# EAGLE board pic (EAGLE 5.06)
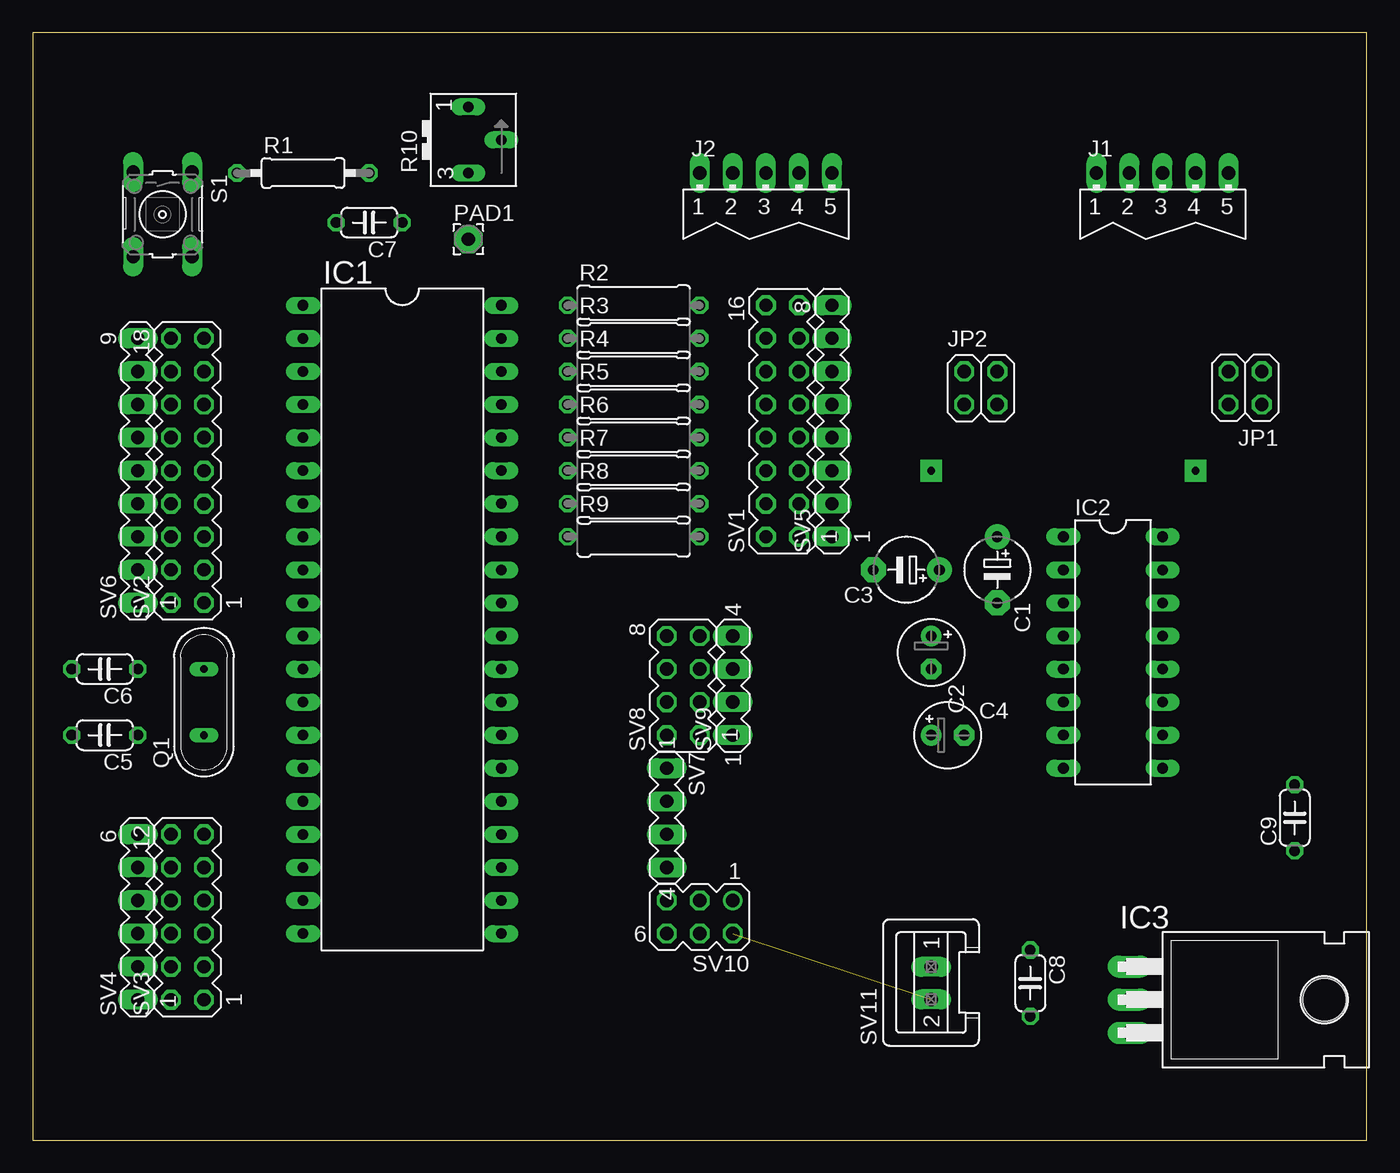
[diagram p0: board, top side]
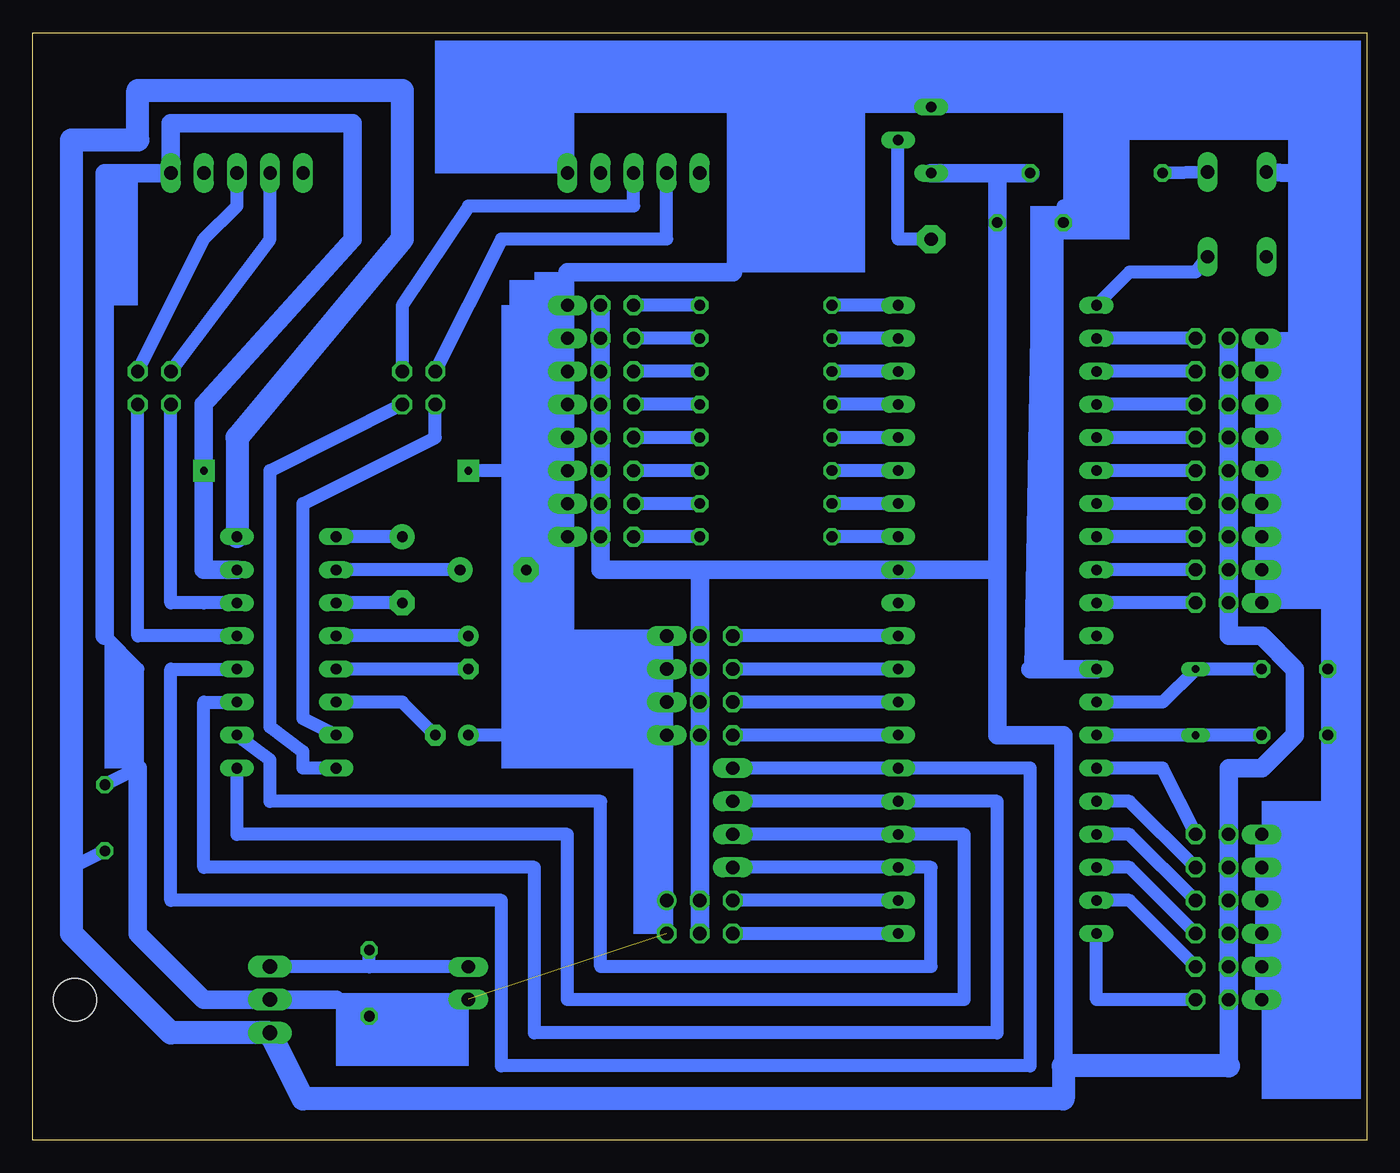
[diagram p1: board, bottom side, seen from below]

Size 102.54 x 85.08 mm. Coordinates in mm from the lower left corner, seen from the top.
Outline: 0,0 102.54,0 102.54,85.08 0,85.08 0,0
Copper layers (1*16): Top 0.035mm / dielectric 1.5mm / Bottom 0.035mm
Design rules "default": minimum track width 10mil, minimum drill 24mil, track to track 8mil, track to pad 8mil, pad to pad 8mil, via to via 8mil, smd to smd 8mil, copper to edge 40mil, drill to drill 8mil, minimum pad ring 10mil, minimum via ring 8mil, stop-mask expansion 4mil, vias tented up to drill 0mil, thermal gap 10mil

## Footprints (pad centres in the part's own frame; a part is rotated, then mirrored left to right if it is on the bottom)
E5-5 = drill 0.813 pad 1.905 round: + -2.54,0 | drill 0.813 pad 1.905 octagon: - 2.54,0
E2,5-5 = drill 0.813 pad 1.6 round: + -1.27,0 | drill 0.813 pad 1.6 octagon: - 1.27,0
C050-024X044 = drill 0.813 octagon: 1 -2.54,0; 2 2.54,0
DIL40 = drill 0.813 long: 1 -24.13,-7.62; 2 -21.59,-7.62; 3 -19.05,-7.62; 4 -16.51,-7.62; 5 -13.97,-7.62; 6 -11.43,-7.62; 7 -8.89,-7.62; 8 -6.35,-7.62; 9 -3.81,-7.62; 10 -1.27,-7.62; 11 1.27,-7.62; 12 3.81,-7.62; 13 6.35,-7.62; 14 8.89,-7.62; 15 11.43,-7.62; 16 13.97,-7.62; 17 16.51,-7.62; 18 19.05,-7.62; 19 21.59,-7.62; 20 24.13,-7.62; 21 24.13,7.62; 22 21.59,7.62; 23 19.05,7.62; 24 16.51,7.62; 25 13.97,7.62; 26 11.43,7.62; 27 8.89,7.62; 28 6.35,7.62; 29 3.81,7.62; 30 1.27,7.62; 31 -1.27,7.62; 32 -3.81,7.62; 33 -6.35,7.62; 34 -8.89,7.62; 35 -11.43,7.62; 36 -13.97,7.62; 37 -16.51,7.62; 38 -19.05,7.62; 39 -21.59,7.62; 40 -24.13,7.62
DIL16 = drill 0.813 long: 1 -8.89,-3.81; 2 -6.35,-3.81; 3 -3.81,-3.81; 4 -1.27,-3.81; 5 1.27,-3.81; 6 3.81,-3.81; 7 6.35,-3.81; 8 8.89,-3.81; 9 8.89,3.81; 10 6.35,3.81; 11 3.81,3.81; 12 1.27,3.81; 13 -1.27,3.81; 14 -3.81,3.81; 15 -6.35,3.81; 16 -8.89,3.81
TO220H = drill 1.118 long: 1 -2.54,-10.16; 2 0,-10.16; 3 2.54,-10.16 | hole 3.302: 0,4.826
JU05 = drill 1.016 long: 1 -5.08,0; 2 -2.54,0; 3 0,0; 4 2.54,0; 5 5.08,0
2X02 = drill 1.016 octagon: 1 -1.27,-1.27; 2 -1.27,1.27; 3 1.27,-1.27; 4 1.27,1.27
2,15/1,0 = drill 1.016 pad 2.159 octagon: 1 0,0
QS = drill 0.61 long: 1 -2.54,0; 2 2.54,0
0207/10 = drill 0.813 octagon: 1 -5.08,0; 2 5.08,0
0309/10 = drill 0.813 octagon: 1 -5.08,0; 2 5.08,0
RJ6S = drill 0.813 long: A 2.54,0; E -2.54,0; S 0,-2.54
B3F-10XX = drill 1.016 long: 1 -3.251,2.261; 2 3.251,2.261; 3 -3.251,-2.261; 4 3.251,-2.261
MA08-2 = drill 1.016 octagon: 1 -8.89,-1.27; 2 -8.89,1.27; 3 -6.35,-1.27; 4 -6.35,1.27; 5 -3.81,-1.27; 6 -3.81,1.27; 7 -1.27,-1.27; 8 -1.27,1.27; 9 1.27,-1.27; 10 1.27,1.27; 11 3.81,-1.27; 12 3.81,1.27; 13 6.35,-1.27; 14 6.35,1.27; 15 8.89,-1.27; 16 8.89,1.27
MA09-2 = drill 1.016 octagon: 1 -10.16,-1.27; 2 -10.16,1.27; 3 -7.62,-1.27; 4 -7.62,1.27; 5 -5.08,-1.27; 6 -5.08,1.27; 7 -2.54,-1.27; 8 -2.54,1.27; 9 0,-1.27; 10 0,1.27; 11 2.54,-1.27; 12 2.54,1.27; 13 5.08,-1.27; 14 5.08,1.27; 15 7.62,-1.27; 16 7.62,1.27; 17 10.16,-1.27; 18 10.16,1.27
MA06-2 = drill 1.016 octagon: 1 -6.35,-1.27; 2 -6.35,1.27; 3 -3.81,-1.27; 4 -3.81,1.27; 5 -1.27,-1.27; 6 -1.27,1.27; 7 1.27,-1.27; 8 1.27,1.27; 9 3.81,-1.27; 10 3.81,1.27; 11 6.35,-1.27; 12 6.35,1.27
MA06-1 = drill 1.016 long: 1 -6.35,0; 2 -3.81,0; 3 -1.27,0; 4 1.27,0; 5 3.81,0; 6 6.35,0
MA08-1 = drill 1.016 long: 1 -8.89,0; 2 -6.35,0; 3 -3.81,0; 4 -1.27,0; 5 1.27,0; 6 3.81,0; 7 6.35,0; 8 8.89,0
MA09-1 = drill 1.016 long: 1 -10.16,0; 2 -7.62,0; 3 -5.08,0; 4 -2.54,0; 5 0,0; 6 2.54,0; 7 5.08,0; 8 7.62,0; 9 10.16,0
MA04-1 = drill 1.016 long: 1 -3.81,0; 2 -1.27,0; 3 1.27,0; 4 3.81,0
MA04-2 = drill 1.016 octagon: 1 -3.81,-1.27; 2 -3.81,1.27; 3 -1.27,-1.27; 4 -1.27,1.27; 5 1.27,-1.27; 6 1.27,1.27; 7 3.81,-1.27; 8 3.81,1.27
MA03-2 = drill 1.016 round: 1 -2.54,-1.27 | drill 1.016 octagon: 2 -2.54,1.27; 3 0,-1.27; 4 0,1.27; 5 2.54,-1.27; 6 2.54,1.27
S02P = drill 1.016 long: 1 1.25,0; 2 -1.25,0

## Placement (x,y rotation side)
C1  1uF  [E5-5]  74.13,43.81 270 top
C2  1uF  [E2,5-5]  69.05,37.46 270 top
C3  1uF  [E5-5]  67.14,43.81 180 top
C4  1uF  [E2,5-5]  70.32,31.11 0 top
C5  22pF  [C050-024X044]  5.55,31.11 180 top
C6  22pF  [C050-024X044]  5.55,36.19 180 top
C7  0.01uF  [C050-024X044]  25.87,70.48 180 top
C8  0.33uF  [C050-024X044]  76.67,12.06 270 top
C9  15uF  [C050-024X044]  96.99,24.76 90 top
IC1  PIC16F877P  [DIL40]  28.41,40 270 top
IC2  MAX232  [DIL16]  83.02,37.46 270 top
IC3  7805T  [TO220H]  94.45,10.79 270 top
J1  [JU05]  86.83,74.29 0 top
J2  [JU05]  56.35,74.29 0 top
JP1  [2X02]  93.18,57.78 180 top
JP2  [2X02]  72.86,57.78 0 top
PAD1  [2,15/1,0]  33.49,69.21 0 top
Q1  [QS]  13.17,33.65 90 top
R1  [0207/10]  20.79,74.29 0 top
R2  [0309/10]  46.19,64.13 0 top
R3  [0309/10]  46.19,61.59 0 top
R4  [0309/10]  46.19,59.05 0 top
R5  [0309/10]  46.19,56.51 0 top
R6  [0309/10]  46.19,53.97 0 top
R7  [0309/10]  46.19,51.43 0 top
R8  [0309/10]  46.19,48.89 0 top
R9  [0309/10]  46.19,46.35 0 top
R10  [RJ6S]  33.49,76.83 90 top
S1  [B3F-10XX]  10,71.11 270 top
SV1  [MA08-2]  57.62,55.24 90 top
SV2  [MA09-2]  11.9,51.43 90 top
SV3  [MA06-2]  11.9,17.14 90 top
SV4  [MA06-1]  8.09,17.14 90 top
SV5  [MA08-1]  61.43,55.24 90 top
SV6  [MA09-1]  8.09,51.43 90 top
SV7  [MA04-1]  48.73,24.76 270 top
SV8  [MA04-2]  50,34.92 90 top
SV9  [MA04-1]  53.81,34.92 90 top
SV10  [MA03-2]  51.27,17.14 180 top
SV11  [S02P]  69.05,12.06 90 top

## Library data of the parts
C1-C9 R1-R9 = rcl
IC1 = microchip
IC2 = maxim
IC3 = linear
J1 J2 = con-lsta
JP1 JP2 = pinhead
PAD1 = wirepad
Q1 = special
R10 = pot
S1 = switch-omron
SV1-SV10 = con-lstb
SV11 = con-amp-mt

## Nets
GND: C3.- C4.+ C5.2 C6.2 C7.2 C8.2 C9.2 IC1.12 IC2.15 IC3.2 J1.5 J2.5 R10.A S1.3 SV4.1 SV4.2 SV4.3 SV4.4 SV4.5 SV4.6 SV5.1 SV5.2 SV5.3 SV5.4 SV5.5 SV5.6 SV5.7 SV5.8 SV6.1 SV6.2 SV6.3 SV6.4 SV6.5 SV6.6 SV6.7 SV6.8 SV6.9 SV9.1 SV9.2 SV9.3 SV9.4 SV10.1 SV10.2 SV11.2
N$1: C1.+ IC2.1
N$2: C1.- IC2.3
N$3: C2.+ IC2.4
N$4: C2.- IC2.5
N$5: R2.2 SV1.16
N$6: C4.- IC2.6
N$7: C3.+ IC2.2
N$8: IC1.40 R2.1
N$9: C6.1 IC1.13 Q1.2
N$10: IC1.25 IC2.11 SV7.2
N$11: IC1.26 IC2.12 SV7.1
N$12: IC2.13 JP1.2
N$13: IC2.14 JP1.4
N$14: C5.1 IC1.14 Q1.1
N$15: R1.1 S1.1
N$16: IC1.1 S1.2
N$17: IC1.39 R3.1
N$18: IC1.38 R4.1
N$19: IC1.37 R5.1
N$20: IC1.36 R6.1
N$21: IC1.35 R7.1
N$22: IC1.34 R8.1
N$23: IC1.33 R9.1
N$24: R3.2 SV1.14
N$25: R4.2 SV1.12
N$26: R5.2 SV1.10
N$27: R6.2 SV1.8
N$28: R7.2 SV1.6
N$29: R8.2 SV1.4
N$30: R9.2 SV1.2
N$32: IC1.2 SV2.17
N$33: IC1.3 SV2.15
N$34: IC1.4 SV2.13
N$35: IC1.5 SV2.11
N$36: IC1.6 SV2.9
N$37: IC1.7 SV2.7
N$38: IC1.8 SV2.5
N$39: IC1.9 SV2.3
N$40: IC1.10 SV2.1
N$41: IC1.15 SV3.11
N$42: IC1.16 SV3.9
N$43: IC1.17 SV3.7
N$44: IC1.18 SV3.5
N$45: IC1.19 SV3.3
N$46: IC1.20 SV3.1
N$47: C8.1 IC3.1 SV11.1
N$48: PAD1.1 R10.S
N$52: IC1.24 IC2.9 SV7.3
N$53: IC1.23 IC2.10 SV7.4
N$54: IC1.30 SV8.8
N$55: IC1.29 SV8.6
N$56: IC1.28 SV8.4
N$57: IC1.27 SV8.2
N$60: IC1.22 SV10.5
N$61: IC1.21 SV10.6
N$64: IC2.7 JP2.1
N$65: IC2.8 JP2.3
N$66: J1.3 JP1.1
N$67: J1.2 JP1.3
N$68: J2.2 JP2.2
N$69: J2.3 JP2.4
VCC: C7.1 C9.1 IC1.32 IC2.16 IC3.3 R1.2 R10.E SV1.1 SV1.3 SV1.5 SV1.7 SV1.9 SV1.11 SV1.13 SV1.15 SV2.2 SV2.4 SV2.6 SV2.8 SV2.10 SV2.12 SV2.14 SV2.16 SV2.18 SV3.2 SV3.4 SV3.6 SV3.8 SV3.10 SV3.12 SV8.1 SV8.3 SV8.5 SV8.7 SV10.3 SV10.4
VDD: IC1.11
VSS: IC1.31

## Tracks (layer width: path | path; a pad name or v marks a point on that pad's centre or on a via)
GND  (via drill 0.6 pad 1.68)  (1 unrouted)
  Bottom 1.016: SV4.1 SV4.2 SV4.3 SV4.4 SV4.5 SV4.6 3.01,23.49 C5.2 C6.2 3.01,41.27 SV6.1 SV6.2 SV6.3 SV6.4 SV6.5 SV6.6 SV6.7 SV6.8 SV6.9 5.55,61.59 5.55,70.48 | SV5.8 SV5.7 SV5.6 | SV5.2 SV5.1 61.43,43.81 | SV5.5 SV5.4 | SV9.1 C4.+ | SV9.1 SV10.1 SV10.2 | 61.43,43.81 C3.- | 5.55,70.48 5.55,74.29 | SV11.2 76.67,10.79 | 76.67,10.79 79.21,10.79 | 25.87,36.19 25.23,70.48 C7.2 | C7.2 20.79,70.48 20.79,79.37 | 96.99,38.73 94.45,36.19 94.45,28.57 C9.2 | 48.73,79.37 48.73,66.67 | 69.05,51.43 SV5.3 SV5.2 | SV5.8 SV5.6 | SV5.6 SV5.5 | SV5.5 SV5.2 | 61.43,66.67 SV5.8 | SV5.6 SV5.5 | 48.73,79.37 R10.A 20.79,79.37 | 48.73,79.37 61.43,79.37 J2.5 | C7.2 23.33,71.75 | SV9.4 SV9.3 | SV9.3 SV9.2 | SV9.2 SV9.1 | SV9.4 61.43,38.73 61.43,43.81 | 76.67,10.79 C8.2 | 5.55,70.48 5.55,79.37 20.79,79.37 | SV9.4 SV9.3 | SV9.3 SV9.2
  Bottom 1.422: 5.55,74.29 S1.3 | 25.87,36.19 IC1.12 | 94.45,28.57 94.45,15.87 89.37,10.79 IC3.2 79.21,10.79 | 96.99,38.73 96.99,74.29 J1.5 91.91,78.1 77.94,78.1 77.94,69.21 89.37,56.51 v89.37,51.43 89.37,43.81 IC2.15 | 48.73,66.67 61.43,66.67
N$1
  Bottom 1.016: C1.+ IC2.1
N$2
  Bottom 1.016: C1.- IC2.3
N$3
  Bottom 1.016: C2.+ IC2.4
N$4
  Bottom 1.016: C2.- IC2.5
N$5
  Bottom 1.016: R2.2 SV1.16
N$6
  Bottom 1.016: IC2.6 74.13,33.65 C4.-
N$7
  Bottom 1.016: C3.+ IC2.2
N$8
  Bottom 1.016: IC1.40 R2.1
N$9
  Bottom 1.016: C6.1 Q1.2 15.71,33.65 IC1.13
N$10
  Bottom 1.016: IC2.11 89.37,33.65 89.37,20.95 63.97,20.95 63.97,8.25 28.41,8.25 28.41,26.03 IC1.25 SV7.2
N$11
  Bottom 1.016: IC2.12 91.91,36.19 91.91,18.41 66.51,18.41 66.51,5.71 25.87,5.71 25.87,28.57 IC1.26 SV7.1
N$12
  Bottom 1.016: IC2.13 94.45,38.73 JP1.2
N$13
  Bottom 1.016: IC2.14 89.37,41.27 91.91,41.27 JP1.4
N$14
  Bottom 1.016: C5.1 Q1.1 IC1.14
N$15
  Bottom 1.016: S1.1 R1.1
N$16
  Bottom 1.016: IC1.1 18.25,66.67 13.17,66.67 S1.2
N$17
  Bottom 1.016: IC1.39 R3.1
N$18
  Bottom 1.016: IC1.38 R4.1
N$19
  Bottom 1.016: IC1.37 R5.1
N$20
  Bottom 1.016: IC1.36 R6.1
N$21
  Bottom 1.016: IC1.35 R7.1
N$22
  Bottom 1.016: IC1.34 R8.1
N$23
  Bottom 1.016: IC1.33 R9.1
N$24
  Bottom 1.016: R3.2 SV1.14
N$25
  Bottom 1.016: R4.2 SV1.12
N$26
  Bottom 1.016: R5.2 SV1.10
N$27
  Bottom 1.016: R6.2 SV1.8
N$28
  Bottom 1.016: R7.2 SV1.6
N$29
  Bottom 1.016: R8.2 SV1.4
N$30
  Bottom 1.016: R9.2 SV1.2
N$31  (via drill 0.6 pad 1.68)
  other vias: 69.05,51.43
N$32
  Bottom 1.016: SV2.17 IC1.2
N$33
  Bottom 1.016: SV2.15 IC1.3
N$34
  Bottom 1.016: SV2.13 IC1.4
N$35
  Bottom 1.016: SV2.11 IC1.5
N$36
  Bottom 1.016: SV2.9 IC1.6
N$37
  Bottom 1.016: SV2.7 IC1.7
N$38
  Bottom 1.016: SV2.5 IC1.8
N$39
  Bottom 1.016: SV2.3 IC1.9
N$40
  Bottom 1.016: SV2.1 IC1.10
N$41
  Bottom 1.016: IC1.15 15.71,28.57 SV3.11
N$42
  Bottom 1.016: IC1.16 18.25,26.03 SV3.9
N$43
  Bottom 1.016: IC1.17 18.25,23.49 SV3.7
N$44
  Bottom 1.016: IC1.18 18.25,20.95 SV3.5
N$45
  Bottom 1.016: IC1.19 18.25,18.41 SV3.3
N$46
  Bottom 1.016: IC1.20 20.79,10.79 SV3.1
N$47
  Bottom 1.016: SV11.1 76.67,13.31 | 76.67,13.31 84.27,13.31 IC3.1 | 76.67,13.31 C8.1
N$48
  Bottom 1.016: R10.S 36.03,69.21 PAD1.1
N$52
  Bottom 1.016: IC2.9 86.83,23.49 61.43,23.49 61.43,10.79 30.95,10.79 30.95,23.49 IC1.24 SV7.3
N$53
  Bottom 1.016: IC2.10 84.29,29.2 84.29,26.03 58.89,26.03 58.89,13.33 33.49,13.33 33.49,20.95 IC1.23 SV7.4
N$54
  Bottom 1.016: IC1.30 SV8.8
N$55
  Bottom 1.016: IC1.29 SV8.6
N$56
  Bottom 1.016: IC1.28 SV8.4
N$57
  Bottom 1.016: IC1.27 SV8.2
N$60
  Bottom 1.016: IC1.22 SV10.5
N$61
  Bottom 1.016: IC1.21 SV10.6
N$64
  Bottom 1.016: JP2.1 71.59,53.97 81.75,48.89 81.75,32.38 IC2.7
N$65
  Bottom 1.016: JP2.3 84.29,51.43 84.29,31.74 81.75,29.84 81.75,28.57 IC2.8
N$66
  Bottom 1.016: J1.3 86.83,71.75 89.37,69.21 JP1.1
N$67
  Bottom 1.016: JP1.3 84.29,69.21 J1.2
N$68
  Bottom 1.016: JP2.2 66.51,69.21 53.81,69.21 J2.2
N$69
  Bottom 1.016: JP2.4 74.13,64.13 69.05,71.75 56.35,71.75 J2.3
VCC
  Bottom 1.016: 99.53,20.95 C9.1
  Bottom 1.422: SV2.18 SV2.16 SV2.14 SV2.12 SV2.10 SV2.8 SV2.6 SV2.4 SV2.2 10.63,38.73 8.09,38.73 5.55,36.19 5.55,31.11 8.09,28.57 10.63,28.57 SV3.12 SV3.10 SV3.8 SV3.6 SV3.4 SV3.2 10.63,5.71 | SV1.15 SV1.13 SV1.11 SV1.9 SV1.7 SV1.5 SV1.3 SV1.1 58.89,43.81 51.27,43.81 | 28.41,43.81 28.41,31.11 23.33,31.11 23.33,5.71 | 28.41,74.29 R1.2 | 28.41,74.29 R10.E | 28.41,43.81 IC1.32 51.27,43.81 | 28.41,74.29 C7.1 28.41,43.81 | SV10.4 SV10.3 SV8.1 SV8.3 SV8.5 SV8.7 51.27,43.81
  Bottom 1.778: 10.63,5.71 23.33,5.71 23.33,3.17 81.75,3.17 IC3.3 91.91,8.25 99.53,15.87 99.53,20.95 99.53,76.83 94.45,76.83 94.45,80.64 74.13,80.64 74.13,69.21 86.83,53.97 IC2.16
(copper drawn outside any net)
  shapes: Bottom area x36